# EAGLE board smarty04.job (EAGLE 6.5.0)
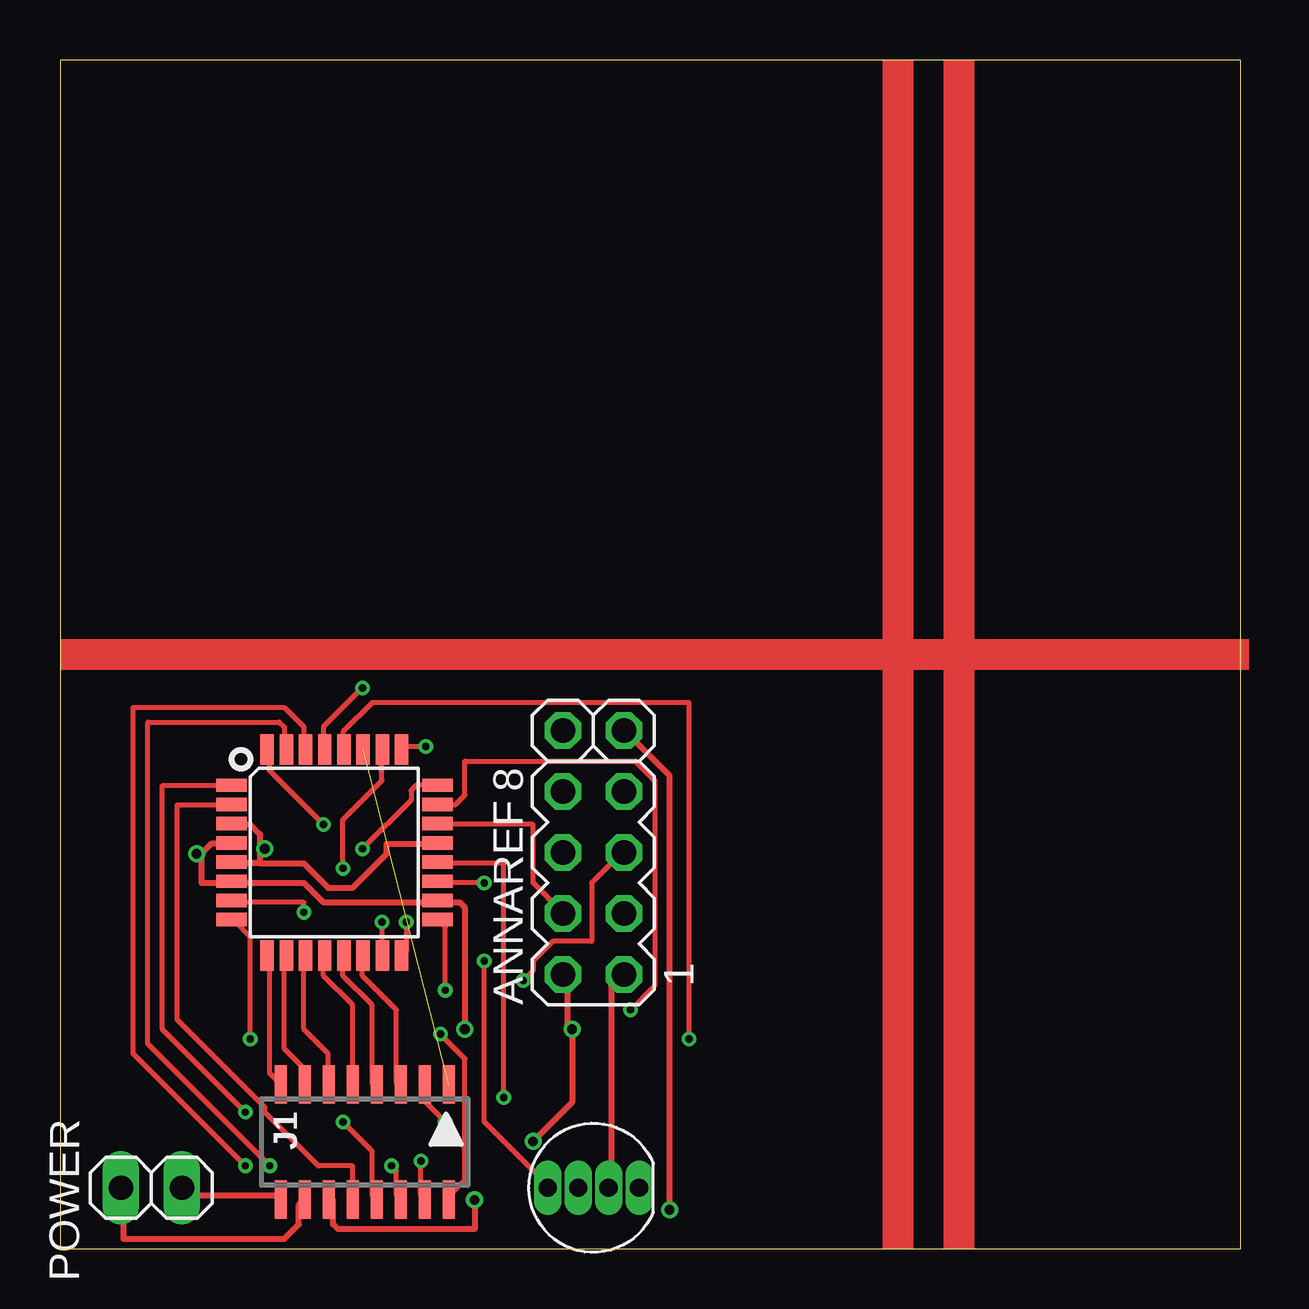
[diagram p0: board, top side]
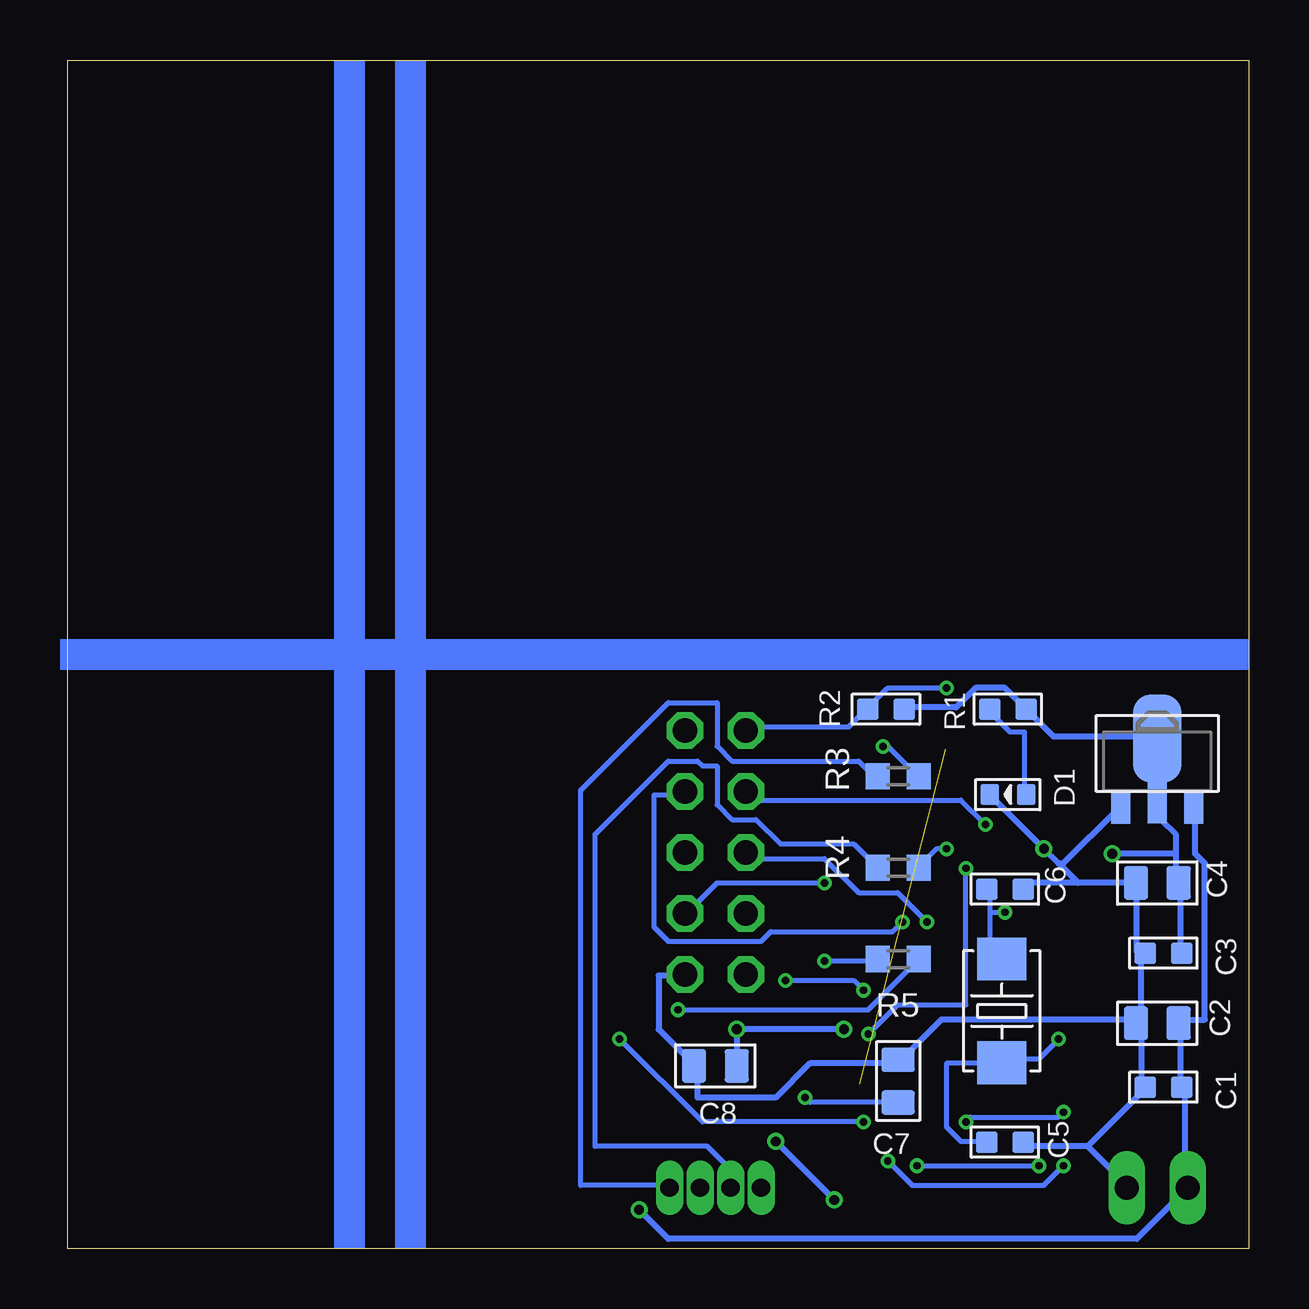
[diagram p1: board, bottom side, seen from below]

Size 49.2 x 49.52 mm. Coordinates in mm from the lower left corner, seen from the top.
Outline: 0,0 49.2,0 49.2,49.52 0,49.52 0,0
Copper layers (1*2*15*16): Top 0.035mm / dielectric 0.2mm / layer 2 0.0175mm / dielectric 1.1mm / layer 15 0.0175mm / dielectric 0.2mm / Bottom 0.035mm
Design rules "SeeedStudio_DRU_no_angle_20130527": minimum track width 6mil, minimum drill 12mil, track to track 6mil, track to pad 6mil, pad to pad 6mil, via to via 6mil, smd to smd 0mil, copper to edge 10mil, drill to drill 10mil, minimum pad ring 6mil, minimum via ring 6mil, stop-mask expansion 2mil, vias tented up to drill 25mil, thermal gap 10mil
Net classes: 0 default: width 0.203 mm, drill 0.203 mm, clearance 0.305 mm; 1 power: width 0.254 mm, drill 0.406 mm, clearance 0.305 mm

## Footprints (pad centres in the part's own frame; a part is rotated, then mirrored left to right if it is on the bottom)
MA04-2 = drill 1.016 octagon: 1 -3.81,-1.27; 2 -3.81,1.27; 3 -1.27,-1.27; 4 -1.27,1.27; 5 1.27,-1.27; 6 1.27,1.27; 7 3.81,-1.27; 8 3.81,1.27
C0603 = smd 0.889 x 0.889: 1 -0.762,0; 2 0.762,0
C0805 = smd 1.016 x 1.397: 1 -0.889,0; 2 0.889,0
LED0603 = smd 0.762 x 0.889: + -0.762,0; - 0.762,0
LED-RGB-THRU = drill 0.762 pad 0.889 long: 1 1.905,0; 2 0.635,0; 3 -0.635,0; 4 -1.905,0
SBH100-NBPC-D08 = smd 0.5 x 1.6: 1 -3.5,-2.4; 2 -3.5,2.4; 3 -2.5,-2.4; 4 -2.5,2.4; 5 -1.5,-2.4; 6 -1.5,2.4; 7 -0.5,-2.4; 8 -0.5,2.4; 9 0.5,-2.4; 10 0.5,2.4; 11 1.5,-2.4; 12 1.5,2.4; 13 2.5,-2.4; 14 2.5,2.4; 15 3.5,-2.4; 16 3.5,2.4
1X01 = drill 1.016 octagon: 1 0,0
1X02 = drill 1.016 long: 1 -1.27,0; 2 1.27,0
2P-SMD-5.0X3.2 = smd 1.778 x 2.032: 1 -2.159,0; 2 2.159,0
R0603 = smd 0.889 x 0.889: 1 -0.762,0; 2 0.762,0
R0603' = smd 1 x 1.1: 1 -0.85,0; 2 0.85,0
SOT89 = smd 0.8 x 1.4: 1 -1.524,-1.905; 3 1.524,-1.905 | smd 0.8 x 1.9: 2 0,-1.651 | smd 2.032 x 3.65: 4 0,0.94
TQFP32 = smd 1.27 x 0.559: 1 -4.293,2.8; 2 -4.293,2; 3 -4.293,1.2; 4 -4.293,0.4; 5 -4.293,-0.4; 6 -4.293,-1.2; 7 -4.293,-2; 8 -4.293,-2.8; 17 4.293,-2.8; 18 4.293,-2; 19 4.293,-1.2; 20 4.293,-0.4; 21 4.293,0.4; 22 4.293,1.2; 23 4.293,2; 24 4.293,2.8 | smd 0.559 x 1.27: 9 -2.8,-4.293; 10 -2,-4.293; 11 -1.2,-4.293; 12 -0.4,-4.293; 13 0.4,-4.293; 14 1.2,-4.293; 15 2,-4.293; 16 2.8,-4.293; 25 2.8,4.293; 26 2,4.293; 27 1.2,4.293; 28 0.4,4.293; 29 -0.4,4.293; 30 -1.2,4.293; 31 -2,4.293; 32 -2.8,4.293

## Placement (x,y rotation side)
ANNAREF  [MA04-2]  22.23,15.24 90 top
C1  [C0603]  3.56,6.73 180 bottom
C2  [C0805]  3.81,9.4 180 bottom
C3  [C0603]  3.56,12.32 180 bottom
C4  [C0805]  3.81,15.24 180 bottom
C5  [C0603]  10.16,4.45 180 bottom
C6  [C0603]  10.16,14.99 180 bottom
C7  0.1uF  [C0805]  14.61,6.99 90 bottom
C8  [C0805]  22.23,7.62 180 bottom
D1  [LED0603]  10.03,18.92 180 bottom
D2  LED-RGB-CC-THRUCLEAR  [LED-RGB-THRU]  22.23,2.54 0 top
J1  CON-SMD-2X8-1.0MM  [SBH100-NBPC-D08]  12.7,4.45 180 top
JP1  [1X01]  23.5,21.59 0 top
JP2  [1X01]  20.95,21.59 0 top
POWER  [1X02]  3.81,2.54 0 top
Q1  CRYSTAL  [2P-SMD-5.0X3.2]  10.29,9.91 90 bottom
R1  1K  [R0603]  10.03,22.48 0 bottom
R2  10k  [R0603]  15.11,22.48 0 bottom
R3  1k  [R0603']  14.61,19.68 180 bottom
R4  1k  [R0603']  14.61,15.88 180 bottom
R5  1k  [R0603']  14.61,12.06 180 bottom
U1  1117-3.3  [SOT89]  3.81,20.32 0 bottom
U2  ATMEGA328P  [TQFP32]  11.43,16.51 0 top

## Library data of the parts
ANNAREF = con-lstb; OC_FARNELL: unknown; OC_NEWARK: unknown
C1-C8 D1 Q1 R1 R2 U1 U2 = OPL
D2 = SparkFun-LED; PROD_ID: DIO-08418
J1 = con-1.0mm
JP1 JP2 POWER = pinhead
R3-R5 = eagle-ltspice; SPICEMODEL: NONE; SPICEPREFIX: R

## Nets
3.3V [power]: ANNAREF.2 C3.1 C4.1 C8.1 J1.12 R1.2 R2.2 U1.2 U1.4 U2.4 U2.6 U2.18
AD0: R5.1 U2.23
AD1: R4.1 U2.24
AD2: R3.1 U2.25
AD3: J1.2 U2.26
CE: ANNAREF.3 U2.19
CS: ANNAREF.4 U2.22
GND [power]: ANNAREF.1 C1.2 C2.2 C3.2 C4.2 C5.1 C6.1 C7.2 C8.2 D1.- D2.2 J1.16 POWER.2 U1.1 U2.3 U2.5 U2.21
IRQ: ANNAREF.8 U2.32
MISO: ANNAREF.7 U2.16
MOSI: ANNAREF.6 U2.15
N$1: C7.1 U2.20
N$2: C6.2 Q1.2 U2.7
N$3: D2.1 R3.2
N$4: C5.2 Q1.1 U2.8
N$5: D1.+ R1.1
N$6: D2.3 R4.2
N$7: D2.4 R5.2
PIN3: J1.8 U2.1
PIN4: J1.10 U2.2
PIN5: J1.15 U2.9
PIN6: J1.13 U2.10
PIN7: J1.11 U2.11
PIN8: J1.9 U2.12
PIN9: J1.7 U2.13
PIN10: J1.5 U2.14
RESET: JP2.1 R2.1 U2.29
RXI: J1.4 U2.30
SCK: ANNAREF.5 U2.17
SCL: J1.3 U2.28
SDA: J1.1 U2.27
TXO: J1.6 U2.31
VSS [power]: C1.1 C2.1 J1.14 JP1.1 POWER.1 U1.3

## Tracks (layer width: path | path; a pad name or v marks a point on that pad's centre or on a via)
3.3V  (via drill 0.41)
  Top 0.254: ANNAREF.2 21.13,11.38 21.13,9.35 v21.34,9.14 21.34,6.1 v19.71,4.47 | v17.27,2.03 17.27,0.81 11.58,0.81 11.38,1.02 11.38,2.03 J1.12 | 5.89,16.46 5.89,15.24 7.11,15.24 U2.6 7.32,15.24 10.16,15.24 10.97,14.43 15.65,14.43 U2.18 15.85,14.43 16.66,14.43 16.87,14.22 v16.87,9.14 | 5.89,16.46 6.3,16.87 7.11,16.87 U2.4 | v5.69,16.46 5.89,16.46
  Bottom 0.254: C8.1 v21.34,9.14 v16.87,9.14 | v19.71,4.47 v17.27,2.03 | C3.1 2.85,12.39 2.85,15.24 C4.1 3.05,15.24 3.05,16.46 | R2.2 14.22,22.55 12.19,22.55 11.38,23.37 10.16,23.37 R1.2 8.13,21.34 3.86,21.34 U1.4 3.86,21.13 3.86,18.69 U1.2 3.66,18.49 3.66,17.88 3.05,17.27 3.05,16.46 | 3.05,16.46 v5.69,16.46
AD0  (via drill 0.3)
  Top 0.203: v23.77,9.96 24.79,10.97 24.79,19.51 23.98,20.32 16.87,20.32 16.87,18.9 16.46,18.49 15.85,18.49 U2.23
  Bottom 0.203: v23.77,9.96 15.85,9.96 13.82,11.99 R5.1
AD1  (via drill 0.3)
  Top 0.203: v12.6,16.66 14.63,18.69 14.63,19.1 14.83,19.3 15.65,19.3 U2.24
  Bottom 0.203: v12.6,16.66 13.01,16.66 13.61,16.05 R4.1
AD2  (via drill 0.3)
  Top 0.203: v15.24,20.93 14.43,20.93 U2.25
  Bottom 0.203: v15.24,20.93 15.04,20.93 13.82,19.71 R3.1
AD3  (via drill 0.3)
  Top 0.203: v11.79,15.85 11.79,17.88 13.41,19.51 13.41,20.73 U2.26 | v15.85,8.94 16.87,7.92 16.87,2.85 16.26,2.23 J1.2
  Bottom 0.203: v11.79,15.85 11.79,10.16 14.63,10.16 v15.85,8.94
CE  (via drill 0.3)
  Top 0.203: v17.68,15.24 15.85,15.24 U2.19
  Bottom 0.203: v17.68,15.24 22.15,15.24 23.37,14.02 ANNAREF.3
CS
  Top 0.203: U2.22 15.85,17.68 19.71,17.68 19.71,15.24 20.93,14.02 ANNAREF.4
GND  (via drill 0.41)
  Top 0.254: D2.2 22.96,2.64 22.96,10.97 23.37,11.38 ANNAREF.1 | 8.33,16.05 7.32,16.05 U2.5 | 8.33,16.66 8.33,17.27 7.92,17.68 7.32,17.68 U2.3 | 8.33,16.66 8.33,16.05 | 8.33,16.05 10.16,16.05 11.18,15.04 12.19,15.04 13.61,16.46 13.61,16.87 15.65,16.87 U2.21 | POWER.2 5.08,2.23 9.14,2.23 J1.16 | v8.53,16.66 8.33,16.66
  Bottom 0.254: ANNAREF.1 23.57,11.38 24.59,11.38 24.59,9.14 23.16,7.72 C8.2 22.96,7.52 22.96,6.3 19.71,6.3 18.29,7.72 14.63,7.72 C7.2 14.43,7.92 12.8,9.55 4.88,9.55 C2.2 | C6.1 9.14,15.24 7.11,15.24 | 7.11,15.24 C4.2 4.67,15.24 4.67,12.39 4.47,12.39 C3.2 4.47,12.19 4.47,9.55 4.67,9.55 C2.2 | 7.11,15.24 7.92,16.05 | 7.92,16.05 v8.53,16.66 D1.- | 7.92,16.05 7.72,16.05 5.49,18.29 U1.1 | 6.71,4.27 9.35,4.27 C5.1 | 6.71,4.27 5.08,2.64 POWER.2 | C2.2 4.67,9.35 4.47,9.35 4.47,6.91 C1.2 4.27,6.71 6.71,4.27
IRQ  (via drill 0.3)
  Top 0.203: v10.97,17.68 8.74,19.91 8.74,20.73 U2.32
  Bottom 0.203: v10.97,17.68 11.99,18.69 20.73,18.69 20.93,18.9 ANNAREF.8
MISO  (via drill 0.3)
  Top 0.203: v14.43,13.61 14.43,12.39 U2.16
  Bottom 0.203: v14.43,13.61 14.83,13.21 19.91,13.21 20.32,12.8 24.18,12.8 24.79,13.41 24.79,18.9 23.57,18.9 ANNAREF.7
MOSI  (via drill 0.3)
  Top 0.203: v13.41,13.61 13.41,12.39 U2.15
  Bottom 0.203: v13.41,13.61 14.63,14.83 16.26,14.83 17.68,16.26 20.73,16.26 20.93,16.46 ANNAREF.6
N$1  (via drill 0.3)
  Top 0.203: v18.49,6.3 18.49,16.05 15.85,16.05 U2.20
  Bottom 0.203: v18.49,6.3 18.29,6.1 C7.1
N$2  (via drill 0.3)
  Top 0.203: v10.16,14.02 10.16,14.43 7.32,14.43 U2.7
  Bottom 0.203: 10.97,15.04 C6.2 10.77,14.83 10.77,14.02 | 10.77,14.02 10.77,12.19 10.36,12.19 Q1.2 | 10.77,14.02 v10.16,14.02
N$3
  Bottom 0.203: R3.2 15.65,19.71 16.26,20.32 21.54,20.32 22.15,20.93 22.15,22.76 24.18,22.76 27.84,19.1 27.84,2.64 24.18,2.64 D2.1
N$4  (via drill 0.3)
  Top 0.203: v7.92,8.74 7.92,13.01 7.32,13.61 U2.8
  Bottom 0.203: C5.2 10.97,4.47 11.99,4.47 12.6,5.08 12.6,7.72 10.36,7.72 Q1.1 10.16,7.92 8.74,7.92 v7.92,8.74
N$5
  Bottom 0.203: D1.+ 9.35,19.1 9.35,21.54 9.96,21.54 10.77,22.35 R1.1
N$6
  Bottom 0.203: R4.2 15.65,16.05 16.46,16.87 19.51,16.87 20.52,17.88 21.54,17.88 22.15,18.49 22.15,20.12 22.76,20.12 22.96,20.32 24.18,20.32 27.23,17.27 27.23,4.27 22.55,4.27 21.74,3.45 21.74,2.64 D2.3
N$7  (via drill 0.3)
  Top 0.203: v17.68,11.99 17.68,5.28 20.32,2.64 D2.4
  Bottom 0.203: v17.68,11.99 15.65,11.99 R5.2
PIN3  (via drill 0.3)
  Top 0.203: v7.72,5.69 4.27,9.14 4.27,19.3 7.11,19.3 U2.1 | v11.79,5.28 13.01,4.06 13.01,2.23 J1.8
  Bottom 0.203: v7.72,5.69 7.92,5.49 11.58,5.49 v11.79,5.28
PIN4
  Top 0.203: U2.2 7.11,18.49 4.88,18.49 4.88,9.55 8.53,5.89 8.53,5.69 10.77,3.45 12.19,3.45 12.19,2.23 J1.10
PIN5
  Top 0.203: U2.9 8.74,12.19 8.74,7.32 9.14,6.91 J1.15
PIN6
  Top 0.203: U2.10 9.35,12.19 9.35,8.33 10.16,7.52 10.16,6.91 J1.13
PIN7
  Top 0.203: U2.11 10.16,12.19 10.16,9.14 11.18,8.13 11.18,6.91 J1.11
PIN8
  Top 0.203: U2.12 10.97,12.19 10.97,11.38 12.19,10.16 12.19,6.91 J1.9
PIN9
  Top 0.203: U2.13 11.79,12.19 11.79,11.38 13.01,10.16 13.01,6.91 J1.7
PIN10
  Top 0.203: U2.14 12.6,12.19 12.6,11.38 14.02,9.96 14.02,6.91 J1.5
RESET  (via drill 0.3)
  Top 0.203: v12.6,23.37 10.97,21.74 10.97,20.93 U2.29
  Bottom 0.203: JP2.1 20.93,21.74 16.66,21.74 16.05,22.35 R2.1 15.85,22.55 15.04,23.37 v12.6,23.37
RXI  (via drill 0.3)
  Top 0.203: v7.72,3.45 3.05,8.13 3.05,22.55 9.35,22.55 10.16,21.74 10.16,20.93 U2.30 | v15.04,3.66 15.04,2.23 J1.4
  Bottom 0.203: v7.72,3.45 8.53,2.64 14.02,2.64 v15.04,3.66
SCK  (via drill 0.3)
  Top 0.203: v16.05,10.77 16.05,13.41 15.85,13.61 U2.17 | v19.3,11.18 19.71,11.58 19.71,11.99 20.52,12.8 22.15,12.8 22.15,15.24 23.37,16.46 ANNAREF.5
  Bottom 0.203: v16.05,10.77 16.46,11.18 v19.3,11.18
SCL  (via drill 0.3)
  Top 0.203: v26.21,8.74 26.21,22.76 13.01,22.76 11.79,21.54 11.79,20.93 U2.28 | v16.05,5.28 15.24,6.1 15.24,6.71 J1.3
  Bottom 0.203: v26.21,8.74 22.76,5.28 v16.05,5.28
SDA  (1 unrouted)
TXO  (via drill 0.3)
  Top 0.203: v8.74,3.45 3.66,8.53 3.66,21.95 9.14,21.95 9.35,21.74 9.35,20.93 U2.31 | v13.82,3.45 14.02,3.25 14.02,2.23 J1.6
  Bottom 0.203: v13.82,3.45 v8.74,3.45
VSS  (via drill 0.41)
  Top 0.254: J1.14 10.16,2.03 9.96,1.83 9.96,1.02 9.35,0.41 2.64,0.41 2.64,2.44 POWER.1 | v25.4,1.63 25.4,19.71 23.57,21.54 JP1.1
  Bottom 0.254: U1.3 2.23,18.29 2.23,16.46 1.83,16.05 1.83,9.55 2.85,9.55 C2.1 2.85,9.35 2.85,6.91 C1.1 2.64,6.71 2.64,2.64 POWER.1 4.67,0.41 24.18,0.41 v25.4,1.63
(copper drawn outside any net)
  shapes: Bottom area x3, Top area x3

## Text on the board
tDocu: + | - | -
bDocu: RoboTal / Generic / Smartie | v1.0